# Altium PCB trafficlight.PcbDoc
Units mm, origin at the board's own origin, x right, y up, seen from the top; angles counter-clockwise.
Board outline 100 x 70 mm, 2 copper layers (Top Layer, Bottom Layer); 41 components, 49 nets, 134 pads, 2 vias.
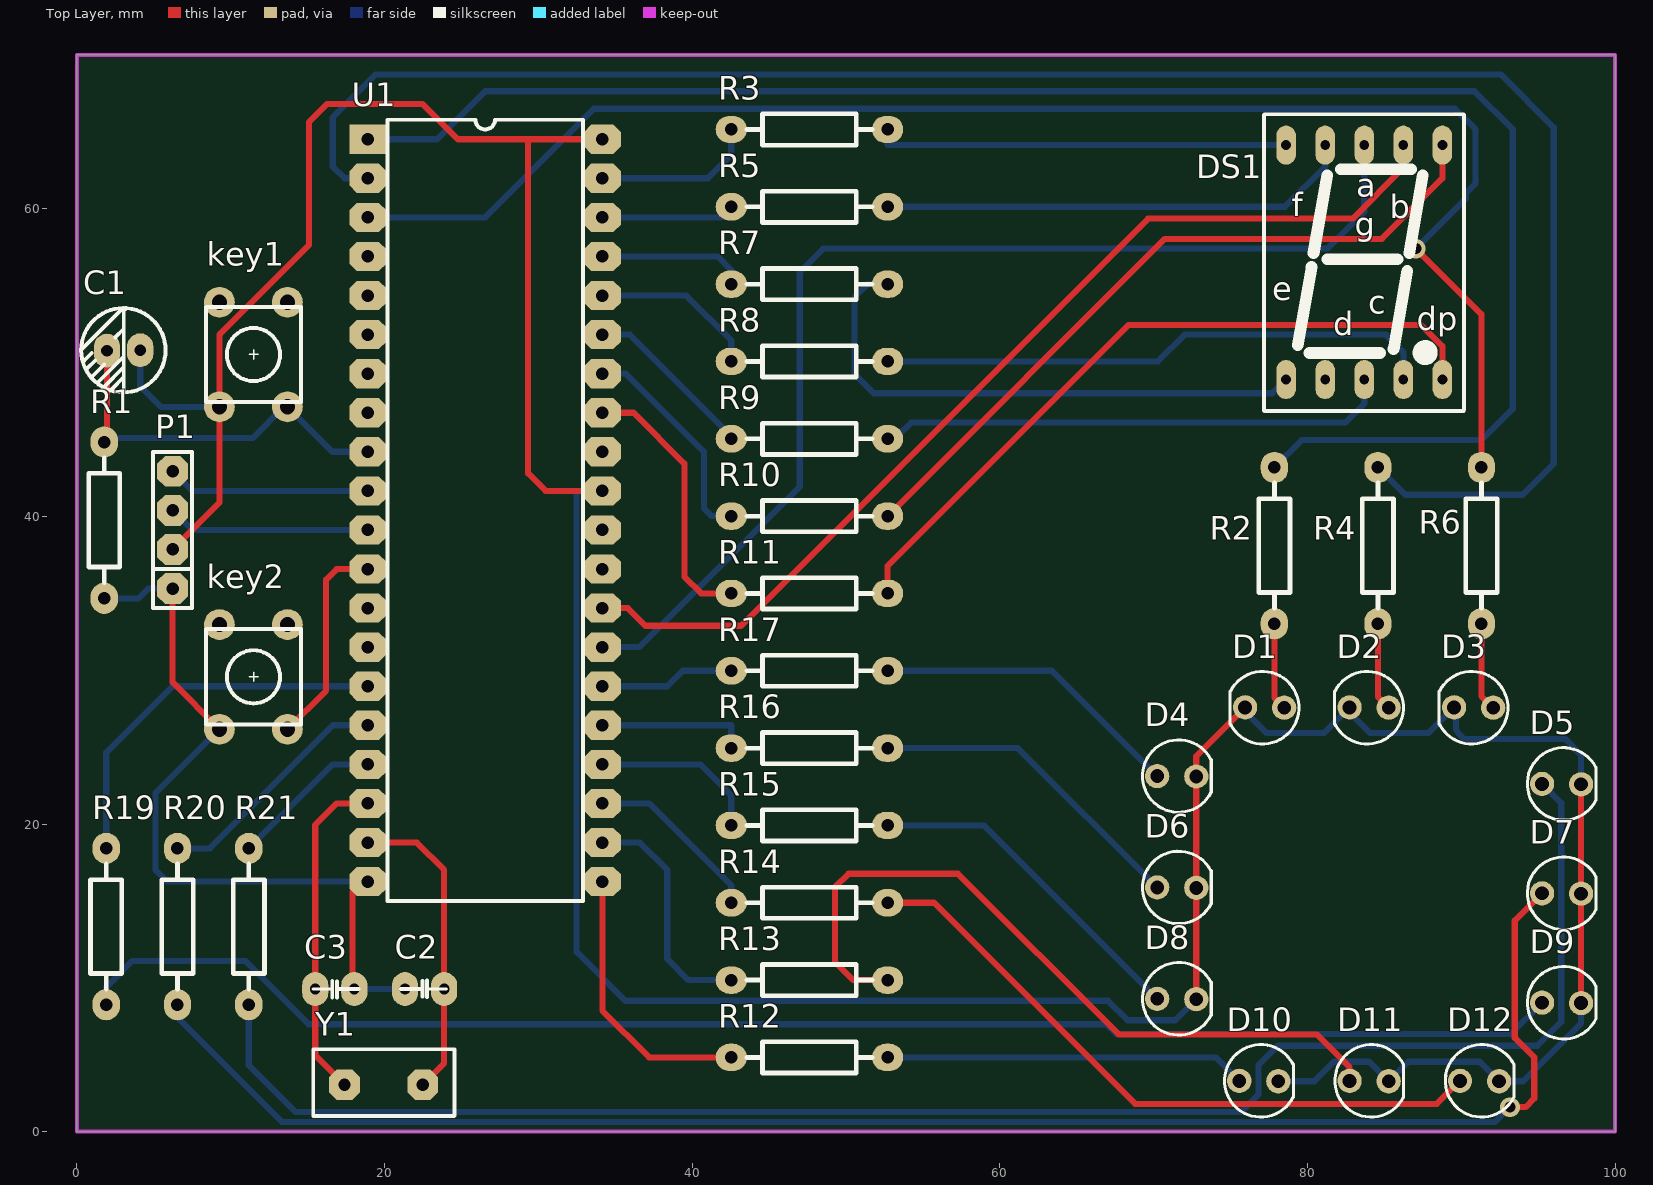
[diagram p0: Top Layer view]
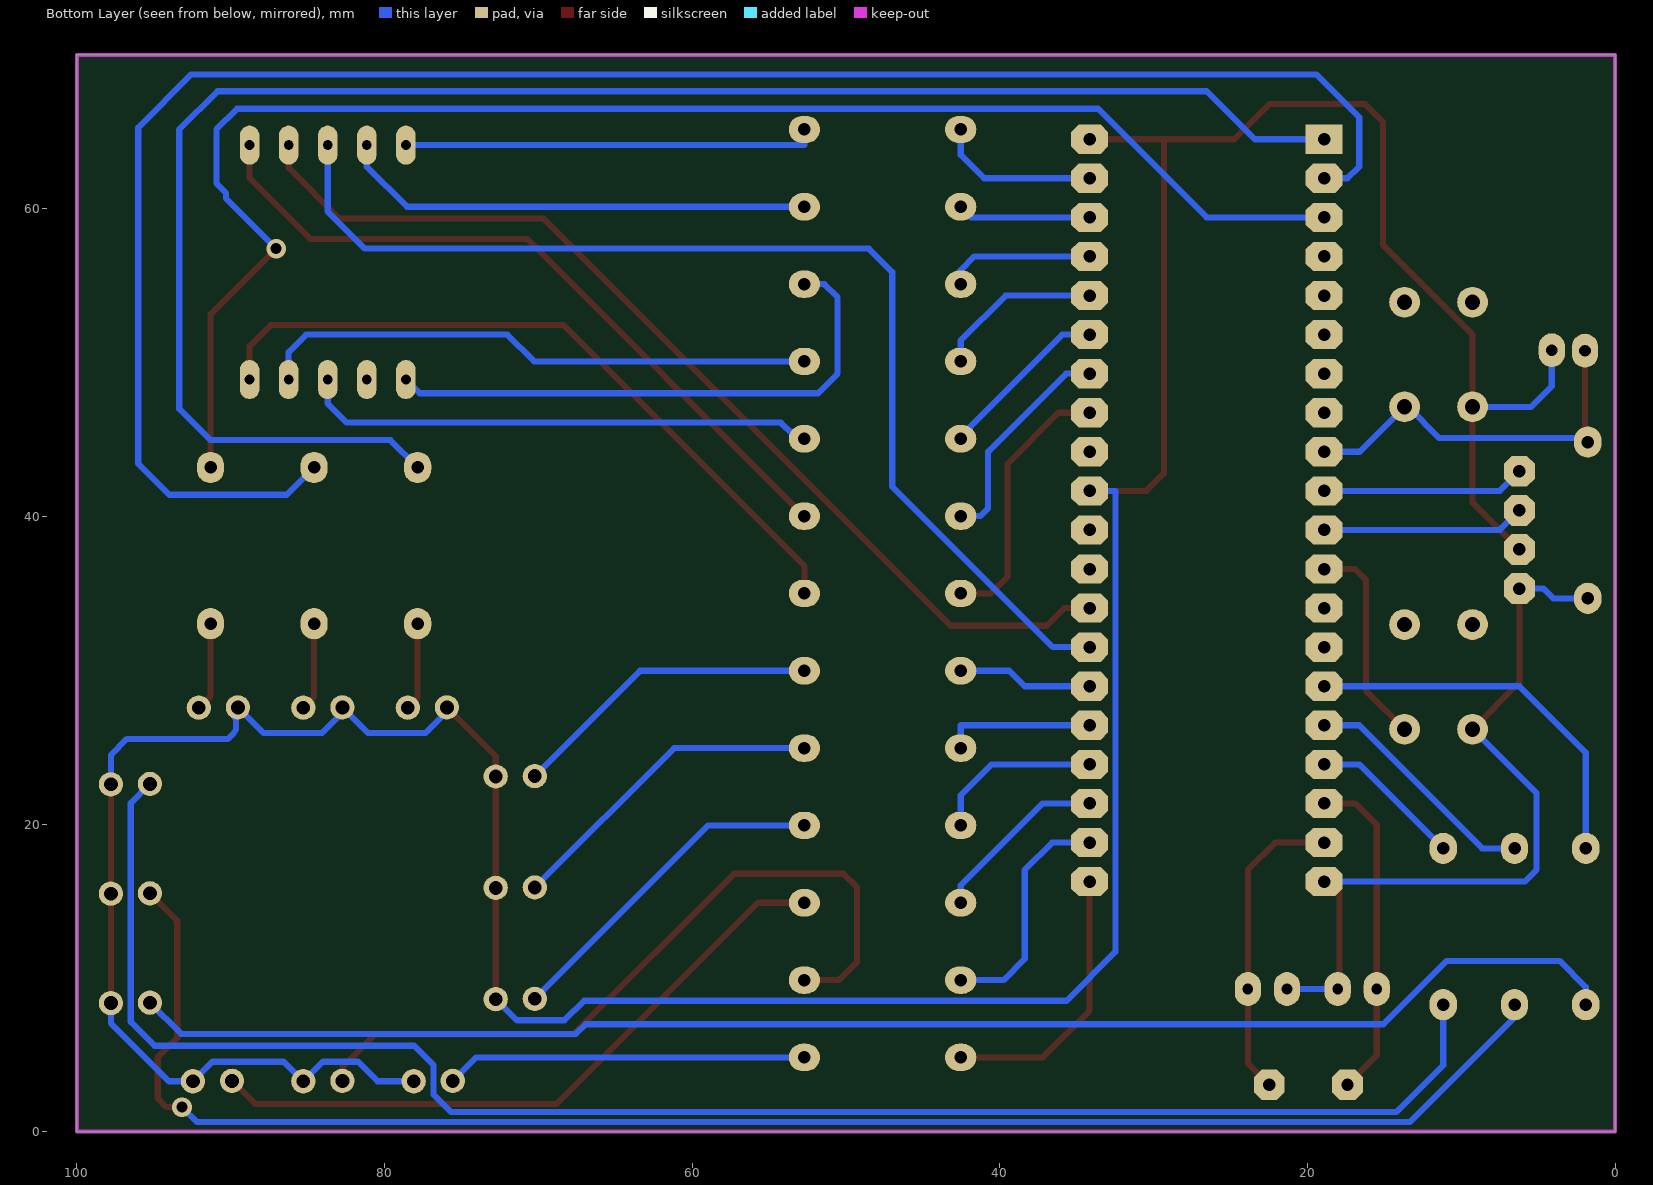
[diagram p1: Bottom Layer view, seen from below]

## Layer stack, top to bottom
Top Layer: signal copper 0.0356
Dielectric: dielectric 0.32, FR-4, Dk 4.8
Bottom Layer: signal copper 0.0356

## Board outline
0,0 100,0 100,70 0,70

## Design rules (kind name [scope] priority, off if disabled: settings)
Clearance [All] p1: gap=0.254
PolygonConnect [All] p1: connectstyle=Relief reliefconductorwidth=0.254 reliefentries=4 polygonreliefangle="90 Angle"
RoutingVias [All] p1: holewidth=0.711 width=1.27 viastyle="Through Hole" minholewidth=0.711 minwidth=1.27 maxholewidth=0.711 maxwidth=1.27
SilkscreenOverComponentPads [All] p1: minsilkscreentomaskgap=0.254
SolderMaskExpansion [All] p1: expansion=0.102
Width [All] p1: maxlimit=0.7 minlimit=0.4 preferedwidth=0.4
27 further rules are at their usual default settings.

## Components (designator, comment, footprint, x,y, rotation, side; value= is the part's Value field where it differs from the comment)
C1 "电解电容" D50V10UF 4.064,50.8 r180 top
C2 "33p" D104 23.876,9.271 r180 top
C3 "33p" D104 15.494,9.271 r0 top
D1 "B_G" LED 75.946,27.559 r0 top
D2 "B_Y" LED 82.74,27.559 r0 top
D3 "B_R" LED 89.535,27.559 r0 top
D4 "X_G" LED 72.771,23.114 r180 top
D5 "D_R" LED 97.79,22.606 r180 top
D6 "X_Y" LED 72.771,15.875 r180 top
D7 "D_Y" LED 97.79,15.494 r180 top
D8 "X_R" LED 72.771,8.636 r180 top
D9 "D_G" LED 97.79,8.382 r180 top
D10 "N_R" LED 78.105,3.302 r180 top
D11 "N_Y" LED 85.281,3.302 r180 top
D12 "N_G" LED 92.456,3.302 r180 top
DS1 "YELLOWCC" 0.5INCH-DISP 78.613,48.895 r0 top
key1 "KEY" 6X6X? 9.271,47.117 r0 top
key2 "KEY" 6X6X? 9.271,26.162 r0 top
P1 "Header 4" SIP4 6.223,35.306 r180 top
R1 "10K" AXIAL0.4 1.778,39.751 r270 top
R2 "10K" AXIAL0.4 77.851,38.1 r270 top
R3 "10K" AXIAL0.4 47.625,65.151 r0 top
R4 "10K" AXIAL0.4 84.582,38.1 r270 top
R5 "10K" AXIAL0.4 47.625,60.124 r0 top
R6 "10K" AXIAL0.4 91.313,38.1 r270 top
R7 "10K" AXIAL0.4 47.625,55.097 r0 top
R8 "10K" AXIAL0.4 47.625,50.07 r0 top
R9 "10K" AXIAL0.4 47.625,45.043 r0 top
R10 "10K" AXIAL0.4 47.625,40.016 r0 top
R11 "10K" AXIAL0.4 47.625,34.988 r0 top
R12 "10K" AXIAL0.4 47.625,4.826 r0 top
R13 "10K" AXIAL0.4 47.625,9.853 r0 top
R14 "10K" AXIAL0.4 47.625,14.88 r0 top
R15 "10K" AXIAL0.4 47.625,19.907 r0 top
R16 "10K" AXIAL0.4 47.625,24.934 r0 top
R17 "10K" AXIAL0.4 47.625,29.961 r0 top
R19 "10K" AXIAL0.4 1.905,13.335 r90 top
R20 "10K" AXIAL0.4 6.54,13.335 r270 top
R21 "10K" AXIAL0.4 11.176,13.335 r270 top
U1 "STC89C52RC" DIP40C 18.923,64.516 r0 top
Y1 "XTAL" 晶振 22.479,3.048 r180 top

## Footprints (in the part's own frame and the unit in brackets; to place one, negate y for a bottom-side part, rotate by r counter-clockwise, add the part's x,y. Pads: shape width x height; smd on the part's side, far side on the other; paste and mask are expansions set on the pad)
0.5INCH-DISP [mm]
  oval 1.27x2.54 hole 0.635: a(0,15.24) b(2.54,15.24) c(0,0) d(7.62,0) dp(2.54,0) e(5.08,0) f(10.16,15.24) g(10.16,0) m1(5.08,15.24) m2(7.62,15.24)
  silkscreen extent -1.45,-2.06 11.56,17.25
6X6X? [mm]
  round 2 hole 1: 1(0,0) 2(4.42,0) 3(4.42,6.807) 4(0,6.807)
  silkscreen extent -0.89,0.3 5.31,6.5
AXIAL0.4 [mil]
  oval 80x70 hole 32: 1(-200,0) 2(200,0)
  silkscreen extent -160,-40 160,40
D50V10UF [mil]
  oval 66.93x86.61 hole 30: 1(-2,0) 2(83,1)
  silkscreen extent -67,-108 149,108
D104 [mm]
  oval 1.7x2.2 hole 0.7: 1(0,0) 2(2.54,0)
  silkscreen extent -0.15,-0.55 2.82,0.52
DIP40C [mm]
  rect 2.4x1.9 hole 0.813: 1(0,0)
  oct 2.4x1.9 hole 0.813: 2(0,-2.54) 3(0,-5.08) 4(0,-7.62) 5(0,-10.16) 6(0,-12.7) 7(0,-15.24) 8(0,-17.78) 9(0,-20.32) 10(0,-22.86) 11(0,-25.4) 12(0,-27.94) 13(0,-30.48) 14(0,-33.02) 15(0,-35.56) 16(0,-38.1) 17(0,-40.64) 18(0,-43.18) 19(0,-45.72) 20(0,-48.26) 21(15.24,-48.26) 22(15.24,-45.72) 23(15.24,-43.18) 24(15.24,-40.64) 25(15.24,-38.1) 26(15.24,-35.56) 27(15.24,-33.02) 28(15.24,-30.48) 29(15.24,-27.94) 30(15.24,-25.4) 31(15.24,-22.86) 32(15.24,-20.32) 33(15.24,-17.78) 34(15.24,-15.24) 35(15.24,-12.7) 36(15.24,-10.16) 37(15.24,-7.62) 38(15.24,-5.08) 39(15.24,-2.54) 40(15.24,0)
  silkscreen extent 1.27,-49.53 13.97,1.27
LED [mil]
  round 62 hole 35.43: 1(0,1) 2(100,0)
  silkscreen extent -38,-93 138,93
SIP4 [mm]
  oct 2x2 hole 0.813: 1(0,0) 2(0,-2.54) 3(0,-5.08) 4(0,-7.62)
  silkscreen extent -1.27,-8.89 1.27,1.27
晶振 [mm]
  oct 2x2 hole 0.8: 1(0,0) 2(5.08,0)
  silkscreen extent -2.06,-2.31 7.11,2.03

## Part data
C2 C3: library part 普通电容
D1 D2 D3 D4 D5 D6 D7 D8 D9 D10 D11 D12: library part LED
DS1: "Common Cathhode Seven-Segment Display, Right Hand Decimal"
P1: "Header, 4-Pin"
R1 R2 R3 R4 R5 R6 R7 R8 R9 R10 R11 R12 R13 R14 R15 R16 R17 R19 R20 R21: library part RES
U1: library part AT89C51
Y1: library part X

## Via types
v1: diameter 1.27, hole 0.711, Top Layer to Bottom Layer, 2 vias

## Nets (pads, with @x,y where several pads share a name; then routed paths per layer and width w, separated by ;. In a path a pad name is that pad's centre, name@x,y a point inside that pad or via, vN(x,y) a via of type N, cw(c..) or ccw(c..) an arc to the next point about the centre after c; other vN are vias at no path point)
A: DS1.a R3.2 | length 26.9
  Bottom Layer w0.4: R3.2 52.705,64.135 DS1.a
B: DS1.b R5.2 | length 30.9
  Bottom Layer w0.4: R5.2 78.539,60.124 81.153,62.738 DS1.b
B_G: D1.2 R2.2 | length 5.7
  Top Layer w0.4: R2.2 77.851,28.194 D1.2
B_R: D3.2 R6.2 | length 5.8
  Top Layer w0.4: R6.2 91.313,28.321 D3.2
B_Y: D2.2 R4.2 | length 5.8
  Top Layer w0.4: R4.2 84.582,28.258 D2.2
C: DS1.c R7.2 | length 36.4
  Bottom Layer w0.4: R7.2 51.414,55.097 50.546,54.229 50.546,49.276 51.816,48.006 77.724,48.006 DS1.c
D: DS1.d R8.2 | length 36.5
  Bottom Layer w0.4: R8.2 70.263,50.07 72.009,51.816 85.09,51.816 86.233,50.673 DS1.d
D_G: D9.2 R19.1 | length 98
  Bottom Layer w0.4: R19.1 1.905,9.398 3.607,11.1 10.947,11.1 15.062,6.985 66.929,6.985 67.564,6.35 93.218,6.35 D9.2
D_R: D5.2 R21.2 | length 110
  Bottom Layer w0.4: R21.2 11.176,4.318 14.224,1.27 75.667,1.27 76.81,2.413 76.81,4.318 78.08,5.588 94.945,5.588 96.495,7.137 96.495,21.361 D5.2
D_Y: D7.2 R20.2 | length 107.1
  Top Layer w0.4: v1(93.167,1.6) 94.183,1.6 94.742,2.159 94.742,4.826 93.472,6.096 93.472,13.716 D7.2
  Bottom Layer w0.4: R20.2 6.54,7.429 13.354,0.616 92.183,0.616 v1(93.167,1.6)
E: DS1.e R9.2 | length 33
  Bottom Layer w0.4: R9.2 R9.2@52.966,45.304 ; R9.2@53.474,45.339 54.236,46.101 82.458,46.101 83.693,47.336 DS1.e
F: DS1.f R10.2 | length 47.3
  Top Layer w0.4: R10.2 70.728,58.039 84.836,58.039 88.773,61.976 DS1.f
G: DS1.g R11.2 | length 47.1
  Top Layer w0.4: R11.2 52.705,36.779 68.377,52.451 87.376,52.451 88.773,51.054 DS1.g
GND: C2.2 C3.2 key2.1 P1.1 R1.2 U1.20 | length 51.9
  Top Layer w0.4: P1.1 6.223,29.21 key2.1 ; C3.2@17.907,9.398 17.907,15.621 18.415,16.129 U1.20@19.939,16.129
  Bottom Layer w0.4: R1.2 4.013,34.671 4.648,35.306 P1.1 ; key2.1 5.105,21.996 5.105,17.018 5.867,16.256 U1.20 ; C3.2 C2.2
INT0: key2.2 U1.12 | length 13.8
  Top Layer w0.4: key2.2 16.205,28.677 16.205,35.89 16.891,36.576 U1.12
M1: DS1.m1 U1.27 | length 73.7
  Bottom Layer w0.4: U1.27 36.551,31.496 46.99,41.935 46.99,55.88 48.514,57.404 81.28,57.404 83.693,59.817 DS1.m1
M2: DS1.m2 U1.28 | length 66.3
  Top Layer w0.4: U1.28 35.814,34.036 36.957,32.893 43.18,32.893 69.647,59.36 82.931,59.36 86.233,62.662 DS1.m2
N_G: D12.2 R14.2 | length 43.2
  Top Layer w0.4: R14.2 55.732,14.88 68.809,1.803 88.417,1.803 D12.2
N_R: D10.2 R12.2 | length 23.5
  Bottom Layer w0.4: R12.2 74.041,4.826 D10.2
N_Y: D11.2 R13.2 | length 48.7
  Top Layer w0.4: R13.2 50.472,9.853 49.276,11.049 49.276,15.875 50.165,16.764 57.277,16.764 67.716,6.325 80.594,6.325 82.74,4.178 D11.2
NetC1_2: 
NetR2_1: R2.1 U1.1 | length 112
  Bottom Layer w0.4: U1.1 23.419,64.516 26.543,67.64 90.856,67.64 93.345,65.151 93.345,46.99 91.313,44.958 79.629,44.958 R2.1
NetR3_1: R3.1 U1.39 | length 10.7
  Bottom Layer w0.4: U1.39 41.021,61.976 42.545,63.5 R3.1
NetR4_1: R4.1 U1.2 | length 122.6
  Bottom Layer w0.4: U1.2 17.399,61.976 16.637,62.738 16.637,65.938 19.431,68.732 92.558,68.732 96.012,65.278 96.012,43.434 93.98,41.402 86.36,41.402 R4.1
NetR5_1: R5.1 U1.38 | length 8.7
  Bottom Layer w0.4: U1.38 41.857,59.436 R5.1
NetR6_1: R6.1 U1.3 | length 100.8
  Top Layer w0.4: v1(87.046,57.404) 91.313,53.137 R6.1
  Bottom Layer w0.4: U1.3 26.543,59.436 33.604,66.497 89.586,66.497 90.932,65.151 90.932,61.646 90.297,61.011 90.297,60.655 v1(87.046,57.404)
NetR7_1: R7.1 U1.37 | length 9.7
  Bottom Layer w0.4: U1.37 41.656,56.896 42.545,56.007 R7.1
NetR8_1: R8.1 U1.36 | length 11
  Bottom Layer w0.4: U1.36 39.624,54.356 42.545,51.435 R8.1
NetR9_1: R9.1 U1.35 | length 11.3
  Bottom Layer w0.4: U1.35 35.941,51.816 42.545,45.212 R9.1
NetR10_1: R10.1 U1.34 | length 14.4
  Bottom Layer w0.4: U1.34 35.687,49.276 40.767,44.196 40.767,40.513 41.264,40.016 R10.1
NetR11_1: R11.1 U1.33 | length 17.6
  Top Layer w0.4: U1.33 36.195,46.736 39.497,43.434 39.497,36.068 40.576,34.989 R11.1
NetR12_1: R12.1 U1.21 | length 18
  Top Layer w0.4: U1.21 34.163,7.874 37.211,4.826 R12.1
NetR13_1: R13.1 U1.22 | length 15.5
  Bottom Layer w0.4: U1.22 36.601,18.796 38.379,17.018 38.379,11.225 39.751,9.853 R13.1
NetR14_1: R14.1 U1.23 | length 11.7
  Bottom Layer w0.4: U1.23 37.211,21.336 42.545,16.002 R14.1
NetR15_1: R15.1 U1.24 | length 11.2
  Bottom Layer w0.4: U1.24 40.538,23.876 42.545,21.869 R15.1
NetR16_1: R16.1 U1.25 | length 9.9
  Bottom Layer w0.4: U1.25 42.545,26.416 R16.1
NetR17_1: R17.1 U1.26 | length 8.8
  Bottom Layer w0.4: U1.26 38.379,28.956 39.385,29.961 R17.1
NetR19_2: R19.2 U1.15 | length 25
  Bottom Layer w0.4: R19.2 1.905,24.638 6.223,28.956 U1.15
NetR20_1: R20.1 U1.16 | length 15.7
  Bottom Layer w0.4: R20.1 8.636,18.415 16.637,26.416 U1.16
NetR21_1: R21.1 U1.17 | length 10
  Bottom Layer w0.4: R21.1 16.637,23.876 U1.17
RESET: C1.2 key1.2 R1.1 U1.9 | length 25.3
  Top Layer w0.4: R1.1 1.956,45.009 C1.2
  Bottom Layer w0.4: R1.1 2.032,45.085 11.43,45.085 13.462,47.117 key1.2 16.612,44.196 U1.9
RXD: P1.4 U1.10 | length 13.2
  Bottom Layer w0.4: P1.4 7.493,41.656 U1.10
TXD: P1.3 U1.11 | length 13.2
  Bottom Layer w0.4: P1.3 7.493,39.116 U1.11
VCC: C1.1 D1.1 D2.1 D3.1 D4.1 D5.1 D6.1 D7.1 D8.1 D9.1 D10.1 D11.1 D12.1 key1.1 P1.2 U1.31 U1.40 | length 249.6
  Top Layer w0.4: P1.2 9.271,40.894 key1.1 9.271,51.816 15.088,57.633 15.088,65.634 16.256,66.802 22.479,66.802 24.765,64.516 U1.40 ; 29.337,64.516 29.337,42.799 30.48,41.656 U1.31 ; D8.1 D6.1 D4.1 72.771,24.409 D1.1 ; D9.1 D7.1 D5.1
  Bottom Layer w0.4: C1.1 4.115,48.463 5.461,47.117 key1.1 ; U1.31 32.487,41.656 32.487,11.684 35.662,8.509 67.031,8.509 68.301,7.239 71.399,7.239 D8.1 ; D1.1 75.946,27.305 77.343,25.908 81.064,25.908 D2.1 82.74,27.241 84.074,25.908 87.859,25.908 D3.1 D3.1@89.002,27.584 ; D10.1 80.448,3.277 81.718,4.547 84.01,4.547 D11.1 86.55,4.547 91.186,4.547 D12.1 94.013,3.277 97.79,7.054 D9.1 ; D3.1@89.852,27.143 89.662,26.797 89.662,26.148 89.852,25.845 90.17,25.527 96.749,25.527 97.79,24.486 D5.1
X1: C2.1 U1.19 Y1.1 | length 20.2
  Top Layer w0.4: U1.19 22.098,18.796 23.876,17.018 C2.1 23.876,4.445 Y1.1
X2: C3.1 U1.18 Y1.2 | length 21.7
  Top Layer w0.4: Y1.2 15.494,4.953 C3.1 15.494,19.939 16.891,21.336 U1.18
X_G: D4.2 R17.2 | length 20.4
  Bottom Layer w0.4: R17.2 63.384,29.961 D4.2
X_R: D8.2 R15.2 | length 22.2
  Bottom Layer w0.4: R15.2 58.96,19.907 D8.2
X_Y: D6.2 R16.2 | length 21.3
  Bottom Layer w0.4: R16.2 61.172,24.934 D6.2
pads on no net: DS1.dp key1.3 key1.4 key2.3 key2.4 U1.4 U1.5 U1.6 U1.7 U1.8 U1.13 U1.14 U1.29 U1.30 U1.32

## Keep-outs
Keep-Out Layer:
  the board outline again, w0.254

## Text inside footprints (layer, text, board x,y; h text height)
DS1: Top Overlay "c" at 83.947,53.162 h1.52; Top Overlay "dp" at 87.097,52.095 h1.52; Top Overlay "e" at 77.724,54.051 h1.52; Top Overlay "d" at 81.661,51.765 h1.52; Top Overlay "a" at 83.185,60.782 h1.52; Top Overlay "g" at 83.058,58.242 h1.52; Top Overlay "b" at 85.344,59.385 h1.52; Top Overlay "f" at 78.994,59.512 h1.52